# EAGLE board TSAL (EAGLE 8.5.1)
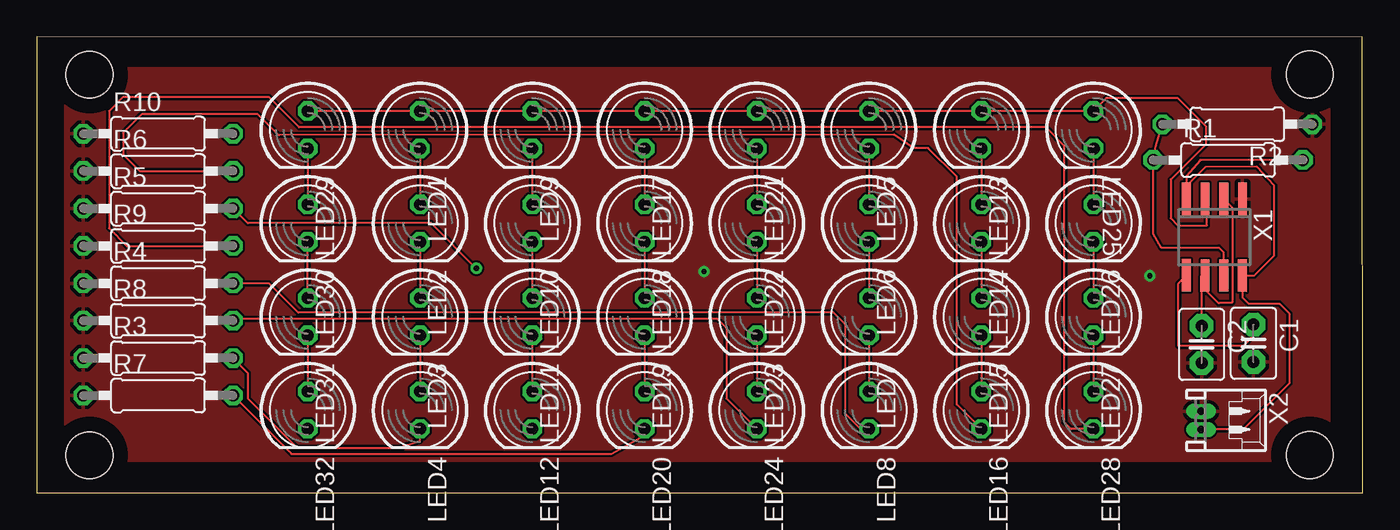
[diagram p0: board, top side]
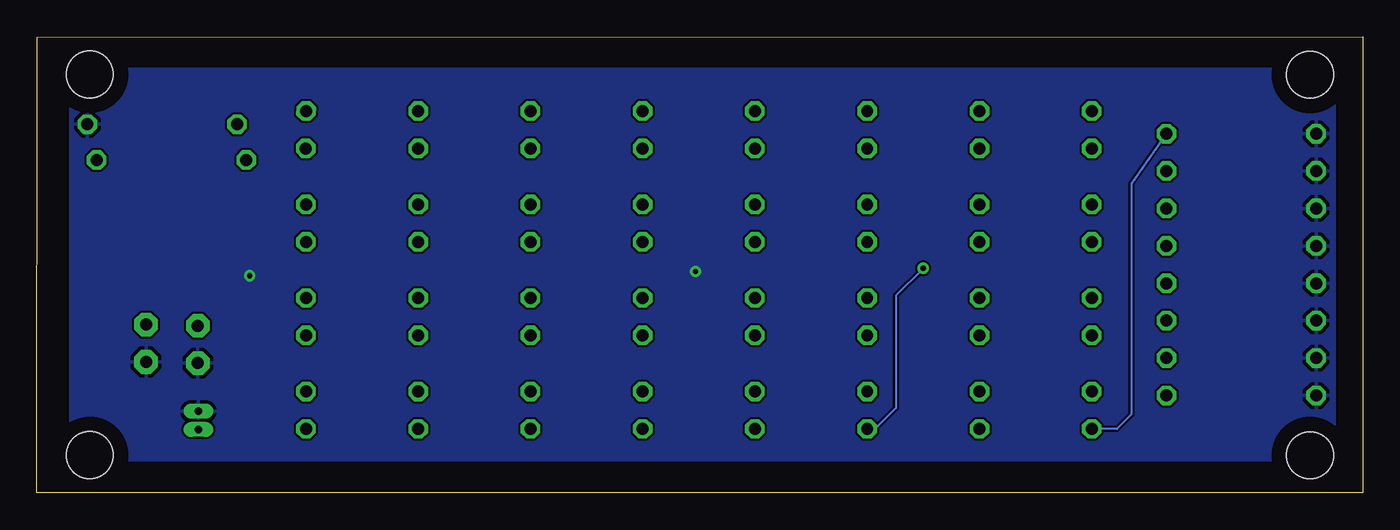
[diagram p1: board, bottom side, seen from below]

Size 90 x 30.98 mm. Coordinates in mm from the lower left corner, seen from the top.
Outline: 0,0 90,0.01 89.99,30.96 0,30.98 0,0
Copper layers (1*16): Top 0.035mm / dielectric 1.5mm / Bottom 0.035mm
Design rules "default": minimum track width 6mil, minimum drill 0.35mm, track to track 6mil, track to pad 6mil, pad to pad 6mil, via to via 6mil, smd to smd 6mil, copper to edge 40mil, drill to drill 6mil, minimum pad ring 10mil, minimum via ring 8mil, stop-mask expansion 4mil, vias tented up to drill 0mil, thermal gap 10mil
Holes 3.17 mm at 3.57,28.41 3.58,2.56 86.42,2.57 86.42,28.42

## Footprints (pad centres in the part's own frame; a part is rotated, then mirrored left to right if it is on the bottom)
C2.5-3 = drill 0.813 pad 1.6 octagon: 1 -1.27,0; 2 1.27,0
LED5MM = drill 0.813 octagon: A -1.27,0; K 1.27,0
0207/10 = drill 0.813 octagon: 1 -5.08,0; 2 5.08,0
SOIC8 = smd 0.6 x 2.2: 1 -1.905,-2.6; 2 -0.635,-2.6; 3 0.635,-2.6; 4 1.905,-2.6; 5 1.905,2.6; 6 0.635,2.6; 7 -0.635,2.6; 8 -1.905,2.6
53048-02 = drill 0.5 pad 0.698 long: 1 0.625,-1.25; 2 -0.625,-1.25

## Placement (x,y rotation side)
C1  10nf  [C2.5-3]  82.59,10.17 270 top
C2  47uf  [C2.5-3]  79.07,10.09 270 top
LED1  [LED5MM]  26.01,24.67 270 top
LED2  [LED5MM]  26.01,18.32 270 top
LED3  [LED5MM]  26.01,11.97 270 top
LED4  [LED5MM]  26.01,5.62 270 top
LED5  [LED5MM]  56.49,24.67 270 top
LED6  [LED5MM]  56.49,18.32 270 top
LED7  [LED5MM]  56.49,11.97 270 top
LED8  [LED5MM]  56.49,5.62 270 top
LED9  [LED5MM]  33.63,24.67 270 top
LED10  [LED5MM]  33.63,18.32 270 top
LED11  [LED5MM]  33.63,11.97 270 top
LED12  [LED5MM]  33.63,5.62 270 top
LED13  [LED5MM]  64.11,24.67 270 top
LED14  [LED5MM]  64.11,18.32 270 top
LED15  [LED5MM]  64.11,11.97 270 top
LED16  [LED5MM]  64.11,5.62 270 top
LED17  [LED5MM]  41.25,24.67 270 top
LED18  [LED5MM]  41.25,18.32 270 top
LED19  [LED5MM]  41.25,11.97 270 top
LED20  [LED5MM]  41.25,5.62 270 top
LED21  [LED5MM]  48.87,24.67 270 top
LED22  [LED5MM]  48.87,18.32 270 top
LED23  [LED5MM]  48.87,11.97 270 top
LED24  [LED5MM]  48.87,5.62 270 top
LED25  [LED5MM]  71.73,24.67 270.6 top
LED26  [LED5MM]  71.73,18.32 270 top
LED27  [LED5MM]  71.73,11.97 270 top
LED28  [LED5MM]  71.73,5.62 270 top
LED29  [LED5MM]  18.39,24.67 270 top
LED30  [LED5MM]  18.39,18.32 270 top
LED31  [LED5MM]  18.39,11.97 270 top
LED32  [LED5MM]  18.39,5.62 270 top
R1  4k  [0207/10]  80.87,22.62 0 top
R2  4k  [0207/10]  81.49,25.04 180 top
R3  180  [0207/10]  8.23,9.16 0 top
R4  180  [0207/10]  8.23,14.24 0 top
R5  180  [0207/10]  8.23,19.32 0 top
R6  180  [0207/10]  8.23,21.86 0 top
R7  180  [0207/10]  8.23,6.62 0 top
R8  180  [0207/10]  8.23,11.7 0 top
R9  180  [0207/10]  8.23,16.78 0 top
R10  180  [0207/10]  8.23,24.4 0 top
X1  NE555  [SOIC8]  79.94,17.37 179.9 top
X2  53048-02  [53048-02]  80.29,4.93 270 top

## Library data of the parts
C1 = capacitor-wima; OC_NEWARK: unknown
C2 = capacitor-wima; MPN: UVZ1C470MDD1TD; OC_NEWARK: 65R3135
LED1-LED32 = led; MPN: C503B-RCN-CW0Z0AA1; OC_NEWARK: 08R2993
R1 R2 = resistor; MF: FARNELL; MPN: MCF 0.25W 4K7; OC_NEWARK: 38K0376
R3-R10 = rcl; MF: FARNELL; MPN: MCF 0.25W 180R; OC_NEWARK: 38K0345; SPICEPREFIX: R
X1 = Misc; MF: TEXAS INSTRUMENTS; MPN: NE555P; OC_NEWARK: 60K6706
X2 = con-molex; MF: MOLEX; MPN: 53048-0210; OC_FARNELL: 1012259; OC_NEWARK: 57H4718

## Nets
GND: C1.2 C2.2 R2.1 R3.1 R4.1 R5.1 R6.1 R7.1 R8.1 R9.1 R10.1 X1.1 X2.2
N$1: C2.1 X1.2 X1.6
N$2: LED1.K LED2.A
N$3: R1.1 R2.2 X1.7
N$4: C1.1 X1.5
N$5: LED13.K LED14.A
N$6: LED2.K LED3.A
N$7: LED3.K LED4.A
N$8: LED5.K LED6.A
N$9: LED6.K LED7.A
N$10: LED7.K LED8.A
N$11: LED4.K R3.2
N$12: LED8.K R4.2
N$13: LED9.K LED10.A
N$14: LED10.K LED11.A
N$15: LED11.K LED12.A
N$16: LED12.K R5.2
N$17: LED14.K LED15.A
N$18: LED15.K LED16.A
N$19: LED16.K R6.2
N$20: LED17.K LED18.A
N$21: LED18.K LED19.A
N$22: LED19.K LED20.A
N$23: LED20.K R7.2
N$24: LED21.K LED22.A
N$25: LED22.K LED23.A
N$26: LED23.K LED24.A
N$27: LED24.K R8.2
N$28: LED25.K LED26.A
N$29: LED26.K LED27.A
N$30: LED27.K LED28.A
N$31: LED28.K R9.2
N$32: LED29.K LED30.A
N$33: LED30.K LED31.A
N$34: LED31.K LED32.A
N$35: LED32.K R10.2
OUT555: LED1.A LED5.A LED9.A LED13.A LED17.A LED21.A LED25.A LED29.A X1.3
VCC: R1.2 X1.4 X1.8 X2.1

## Tracks (layer width: path | path; a pad name or v marks a point on that pad's centre or on a via)
GND  (via drill 0.35)
  other vias: 75.55,14.76 45.29,15.04
  pour Top: 1.88,28.85 1.88,2.18 87.78,2.18 87.78,28.85
  pour Bottom: 1.88,28.85 1.88,2.18 87.74,2.18 87.74,28.85
N$1
  Top 0.152: C2.1 79.07,14.54 79.26,14.74 | 79.26,14.74 X1.6 | 80.62,19.93 X1.2 80.62,19.93 | 80.62,19.93 81.17,19.38 81.17,12.96 81.12,12.92 80.28,12.92 80.23,12.87 79.3,13.81 X1.6 | X1.6 | X1.6 79.25,14.75 79.26,14.74
N$2
  Top 0.152: LED1.K LED2.A
N$3
  Top 0.152: R2.2 75.98,23.57 R1.1 75.8,17.57 76.35,16.64 80.2,16.64 80.23,16.66 80.57,16.32 X1.7 | X1.7 | 80.62,14.75 X1.7
N$4
  Top 0.152: C1.1 82.59,10.69 81.89,9.99 77.49,9.99 77.49,14.24 X1.5 | X1.5 | X1.5 | X1.5 78.03,14.75 X1.5
N$5
  Top 0.152: LED13.K LED14.A
N$6
  Top 0.152: LED2.K LED3.A
N$7
  Top 0.152: LED3.K LED4.A
N$8
  Top 0.152: LED5.K | LED5.K LED6.A | LED6.A | LED5.K | 56.55,23.44 LED5.K
N$9
  Top 0.152: LED6.K LED7.A
N$10
  Top 0.152: LED7.K LED8.A
N$11
  Top 0.152: R3.2 14.33,8.15 14.33,6.42 17.67,3.08 24.57,3.08 26.01,3.53 LED4.K
N$12
  Top 0.152: LED8.K 55.92,4.35 54.86,5.42 54.86,11.47 54.07,12.26 | 53.97,12.36 54.07,12.26 | 54.07,12.26 17.74,12.26 15.76,14.24 R4.2
N$13
  Top 0.152: LED9.K LED10.A
N$14
  Top 0.152: LED10.K LED11.A
N$15
  Top 0.152: LED11.K LED12.A
N$16  (via drill 0.35)
  Top 0.152: v29.83,15.26 26.77,18.32 14.31,18.32 R5.2
  Bottom 0.152: v29.83,15.26 31.68,13.42 31.68,5.77 33.09,4.35 LED12.K
N$17
  Top 0.152: LED14.K LED15.A
N$18
  Top 0.152: LED15.K LED16.A
N$19
  Top 0.152: LED16.K 62.45,6.02 62.45,21.48 60.5,23.43 59.49,23.43 58.18,24.32 16.42,24.29 15,25.72 7.11,25.72 5.86,24.46 5.86,23 6.99,21.86 R6.2
N$20
  Top 0.152: LED17.K LED18.A
N$21
  Top 0.152: LED18.K LED19.A
N$22
  Top 0.152: LED19.K LED20.A
N$23
  Top 0.152: R7.2 17.29,2.65 39,2.65 41.25,3.9 LED20.K
N$24
  Top 0.152: LED21.K LED22.A
N$25
  Top 0.152: LED22.K LED23.A
N$26
  Top 0.152: LED23.K LED24.A
N$27
  Top 0.152: LED24.K 46.81,6.42 46.81,11.2 46.19,11.81 13.42,11.81 R8.2
N$28
  Top 0.152: LED25.K 71.73,23.39 LED26.A
N$29
  Top 0.152: LED26.K LED27.A
N$30
  Top 0.152: LED27.K LED28.A
N$31
  Top 0.152: LED28.K 70.21,4.35 69.77,4.79 69.77,23.57 68.5,24.84 17.8,24.84 15.75,26.89 5.84,26.89 4.9,25.94 4.9,17.98 6.12,16.76 13.29,16.76 R9.2
N$32
  Top 0.152: LED29.K LED30.A
N$33
  Top 0.152: LED31.A LED30.K
N$34
  Top 0.152: LED31.K LED32.A
N$35
  Bottom 0.152: R10.2 15.69,21.03 15.69,5.34 16.68,4.35 LED32.K
OUT555
  Top 0.152: LED17.A | 79.37,19.9 79.42,19.85 79.42,18.18 77.46,18.18 76.97,18.67 76.97,21.3 79.38,23.7 79.38,24.88 77.44,26.82 72.6,26.82 LED25.A | 79.37,19.9 X1.3 | X1.3 | LED25.A | LED25.A 71.63,25.94 | 71.63,25.94 LED13.A | LED13.A | LED13.A LED5.A | LED5.A | LED5.A | LED5.A LED21.A LED17.A | LED17.A LED9.A LED1.A LED29.A | X1.3 79.41,19.93 79.37,19.9 | 71.63,25.94 71.63,25.88 LED25.A
VCC
  Top 0.152: R1.2 78.97,22.61 78.05,21.53 78.04,20.84 | X1.8 82.63,14.77 83.99,16.13 83.99,20.87 82.81,22.16 79.32,22.15 78.04,20.84 | 78.04,20.84 78.04,20.09 | 78.04,20.09 X1.4 | X1.4 | X1.8 81.84,14.75 | 81.84,14.75 81.84,13.28 82.25,12.87 84.35,12.87 85.02,12.2 85.02,7.44 81.89,4.31 X2.1 | X1.8 81.84,14.75 | 78.04,20.09 78.03,20.09 X1.4